# EAGLE board HITB_DXB_V1.1 (EAGLE 9.2.2)
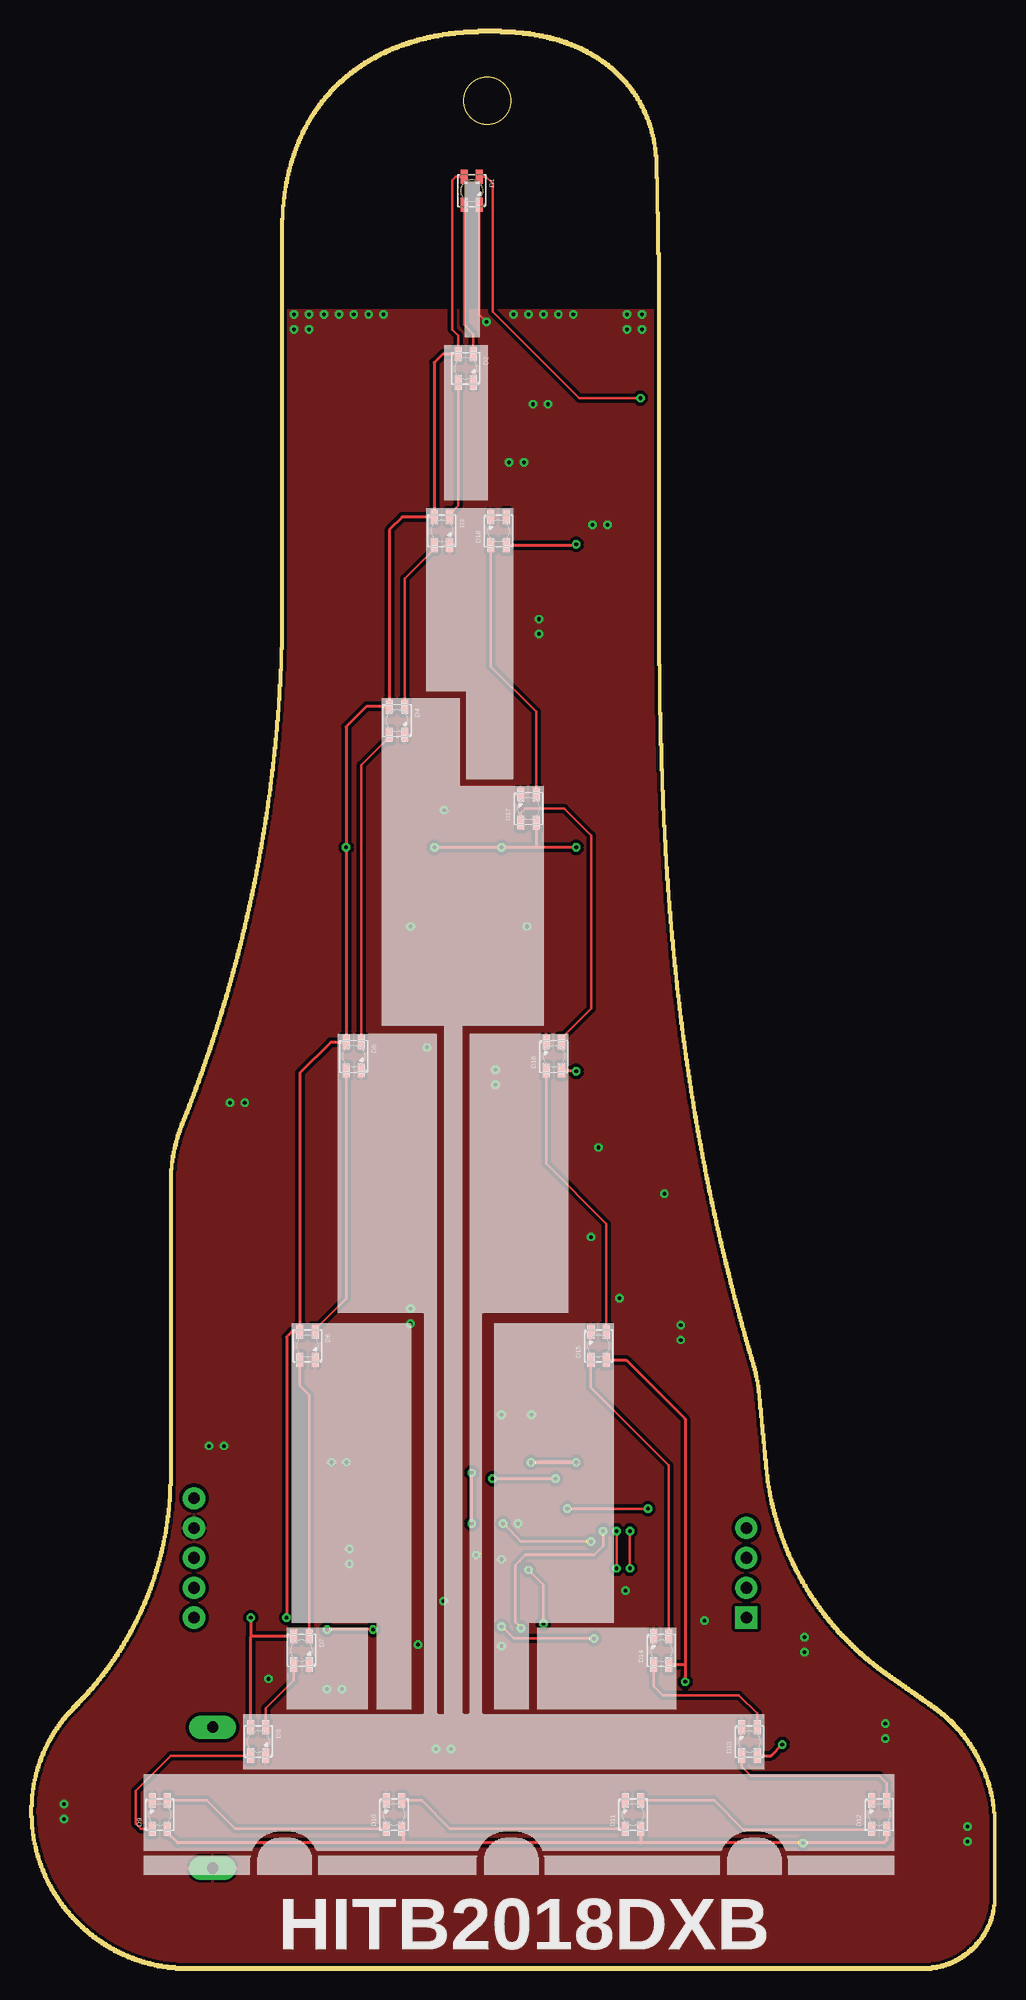
[diagram p0: board, top side]
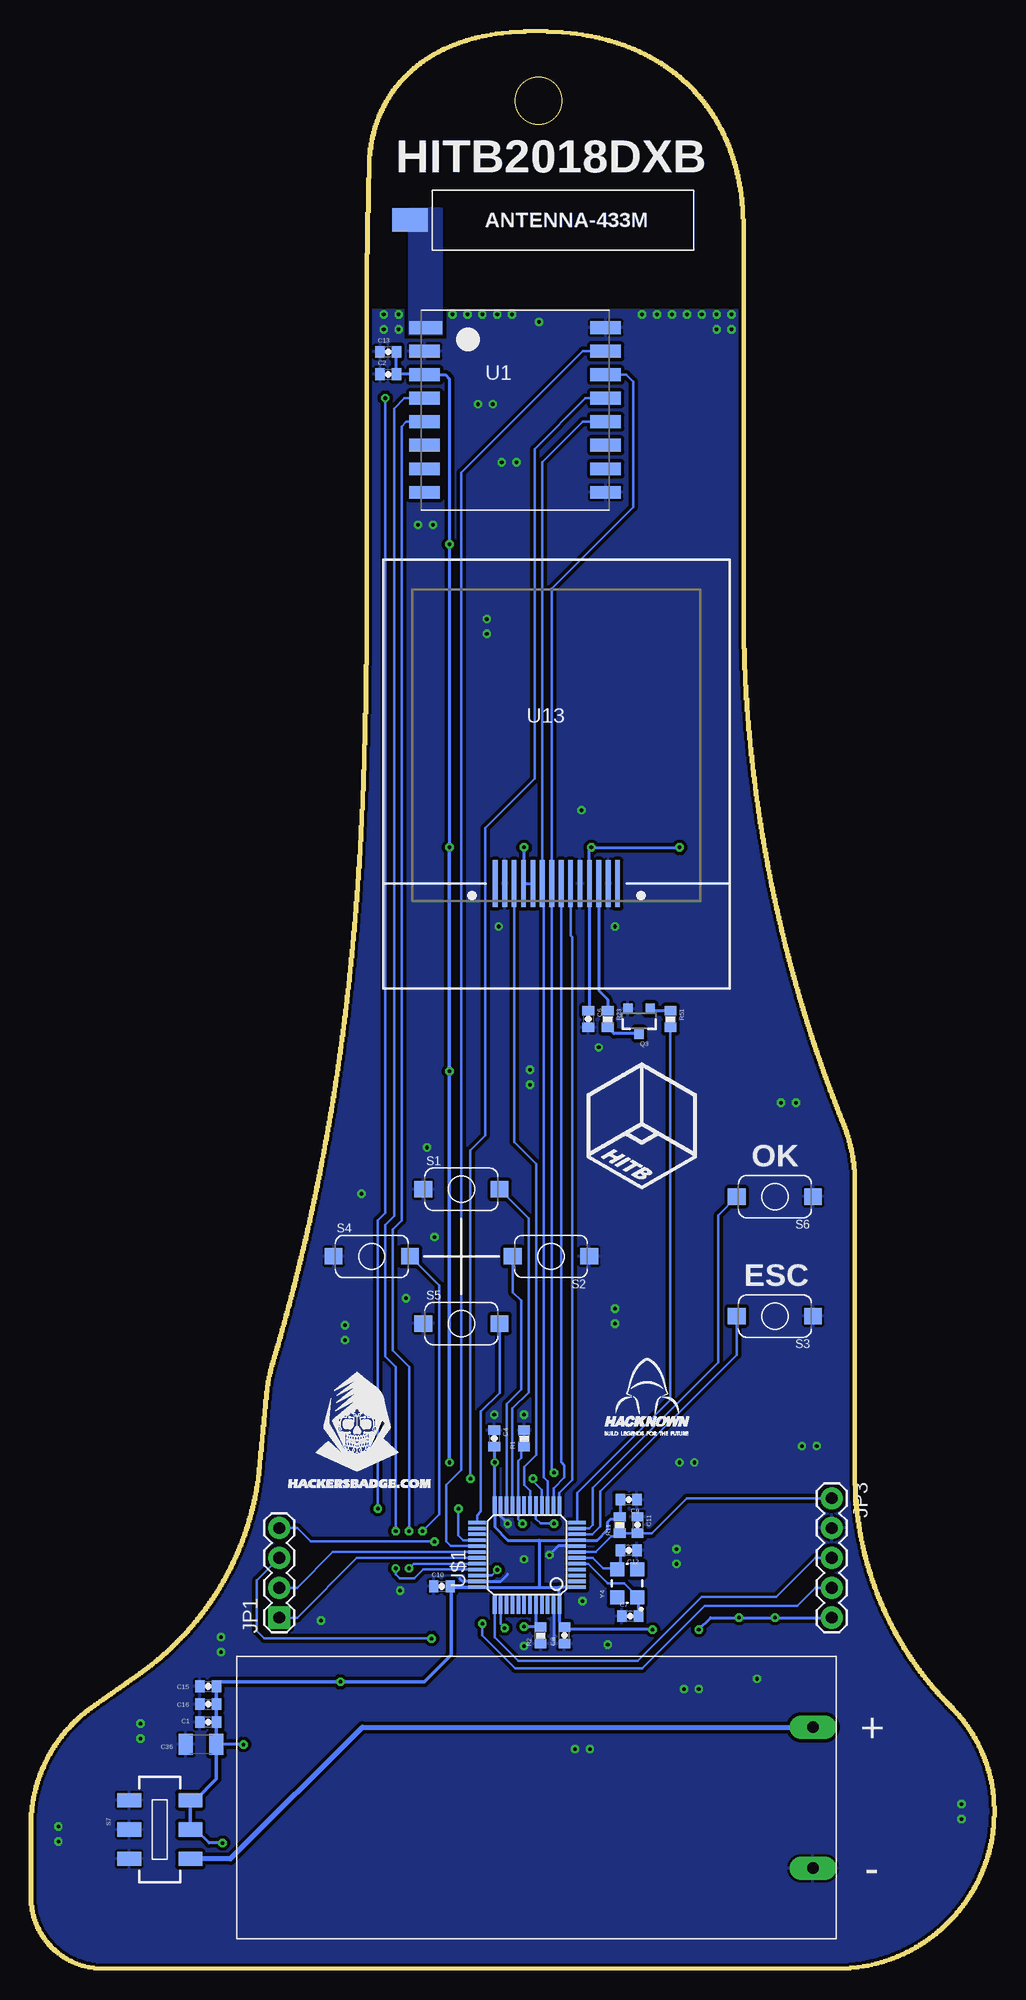
[diagram p1: board, bottom side, seen from below]

Size 82.25 x 165.13 mm. Coordinates in mm from the lower left corner, seen from the top.
Copper layers (1*16): Top 0.035mm / dielectric 1.5mm / Bottom 0.035mm
Design rules "yun": minimum track width 6mil, minimum drill 12mil, track to track 6mil, track to pad 6mil, pad to pad 6mil, via to via 6mil, smd to smd 6mil, copper to edge 10mil, drill to drill 6mil, minimum pad ring 8mil, minimum via ring 8mil, stop-mask expansion 4mil, vias tented up to drill 20mil, thermal gap 8mil
Net classes: 0 default: width 0.203 mm, clearance 0.203 mm; 1 3.3V: width 0.254 mm, clearance 0.254 mm
Milling: area 36.9,157.1 to 40.9,161.1

## Footprints (pad centres in the part's own frame; a part is rotated, then mirrored left to right if it is on the bottom)
BATTERY-AAA_Z2 = drill 0.95 pad 2 long: V+ 23.5,6; V- 23.5,-6
0603-CAP = smd 0.8 x 1: 1 -0.7,0; 2 0.7,0
1206 = smd 1.2 x 1.8: 1 -1.3,0; 2 1.3,0
RGB_2427 = smd 1.2 x 0.6: 1 1.2,-0.65; 2 1.2,0.65; 3 -1.2,0.65; 4 -1.2,-0.65
ANTENNA-433M_TH2550 = smd 3 x 2: P$1 0.635,0
1X04 = drill 1 pad 1.88 square: 1 0,0 | drill 1 pad 1.88: 2 2.54,0; 3 5.08,0; 4 7.62,0
1X05 = drill 1 pad 1.88: 1 0,0; 2 2.54,0; 3 5.08,0; 4 7.62,0; 5 10.16,0
SOT23-3 = smd 0.8 x 0.9: 1 -0.95,-1; 2 0.95,-1; 3 0,1.1
0603-RES = smd 0.8 x 1: 1 -0.7,0; 2 0.7,0
BUTTON_TSSURX = smd 1.5 x 1.4: P$1 -3.25,0; P$2 3.25,0
MSS22D18 = smd 1.2 x 2: 1 -2.5,2.6; 2 0,2.6; 3 2.5,2.6; 4 -2.5,-2.6; 5 0,-2.6; 6 2.5,-2.6
LORA_RA-01 = smd 2.8 x 1.1: 1 -7.6,7 | smd 2.6 x 1.1: 2 -7.7,5; 3 -7.7,3; 4 -7.7,1; 5 -7.7,-1; 6 -7.7,-3; 7 -7.7,-5; 8 -7.7,-7; 9 7.7,-7; 10 7.7,-5; 11 7.7,-3; 12 7.7,-1; 13 7.7,1; 14 7.7,3; 15 7.7,5; 16 7.7,7
TFT_1.44_SMD = smd 0.4 x 4: 1 5.2,-11.76; 2 4.4,-11.76; 3 3.6,-11.76; 4 2.8,-11.76; 5 2,-11.76; 6 1.2,-11.76; 7 0.4,-11.76; 8 -0.4,-11.76; 9 -1.2,-11.76; 10 -2,-11.76; 11 -2.8,-11.76; 12 -3.6,-11.76; 13 -4.4,-11.76; 14 -5.2,-11.76
TQFP48 = smd 0.3 x 1.5: 1 -2.75,-4.25; 2 -2.25,-4.25; 3 -1.75,-4.25; 4 -1.25,-4.25; 5 -0.75,-4.25; 6 -0.25,-4.25; 7 0.25,-4.25; 8 0.75,-4.25; 9 1.25,-4.25; 10 1.75,-4.25; 11 2.25,-4.25; 12 2.75,-4.25; 25 2.75,4.25; 26 2.25,4.25; 27 1.75,4.25; 28 1.25,4.25; 29 0.75,4.25; 30 0.25,4.25; 31 -0.25,4.25; 32 -0.75,4.25; 33 -1.25,4.25; 34 -1.75,4.25; 35 -2.25,4.25; 36 -2.75,4.25 | smd 1.5 x 0.3: 13 4.25,-2.75; 14 4.25,-2.25; 15 4.25,-1.75; 16 4.25,-1.25; 17 4.25,-0.75; 18 4.25,-0.25; 19 4.25,0.25; 20 4.25,0.75; 21 4.25,1.25; 22 4.25,1.75; 23 4.25,2.25; 24 4.25,2.75; 37 -4.25,2.75; 38 -4.25,2.25; 39 -4.25,1.75; 40 -4.25,1.25; 41 -4.25,0.75; 42 -4.25,0.25; 43 -4.25,-0.25; 44 -4.25,-0.75; 45 -4.25,-1.25; 46 -4.25,-1.75; 47 -4.25,-2.25; 48 -4.25,-2.75
CRYSTAL-SMD-3225 = smd 1.2 x 1.2: 1 -1.2,-0.85; 2 1.2,-0.85; 3 1.2,0.85; 4 -1.2,0.85

## Placement (x,y rotation side)
BAT1  [BATTERY-AAA_Z2]  39.09,14.68 0 bottom
C1  1uF  [0603-CAP]  67.04,21.1 0 bottom
C2  0.1uF  [0603-CAP]  51.72,135.78 0 bottom
C4  0.1uF  [0603-CAP]  42.71,45.23 270 bottom
C6  1uF  [0603-CAP]  34.71,80.92 270 bottom
C7  22pF  [0603-CAP]  31.15,30.12 0 bottom
C8  0.1uF  [0603-CAP]  36.74,28.47 90 bottom
C9  0.1uF  [0603-CAP]  31.28,40.03 180 bottom
C10  0.1uF  [0603-CAP]  47.15,32.66 0 bottom
C11  0.1uF  [0603-CAP]  30.52,37.87 270 bottom
C12  22pF  [0603-CAP]  31.28,35.71 180 bottom
C13  22uF  [0603-CAP]  51.72,137.69 0 bottom
C15  10uF  [0603-CAP]  67.04,24.15 0 bottom
C16  22uF  [0603-CAP]  67.04,22.63 0 bottom
C36  47uF  [1206]  67.65,19.2 180 bottom
D1  XT1511-2427  [RGB_2427]  37.63,151.41 270 top
D2  XT1511-2427  [RGB_2427]  37.12,136.29 270 top
D3  XT1511-2427  [RGB_2427]  35.09,122.45 270 top
D4  XT1511-2427  [RGB_2427]  31.28,106.32 270 top
D5  XT1511-2427  [RGB_2427]  27.59,77.75 270 top
D6  XT1511-2427  [RGB_2427]  23.66,53.11 270 top
D7  XT1511-2427  [RGB_2427]  23.15,27.2 270 top
D8  XT1511-2427  [RGB_2427]  19.47,19.45 270 top
D9  XT1511-2427  [RGB_2427]  11.08,13.23 90 top
D10  XT1511-2427  [RGB_2427]  31.02,13.23 90 top
D11  XT1511-2427  [RGB_2427]  51.34,13.23 90 top
D12  XT1511-2427  [RGB_2427]  72.3,13.23 90 top
D13  XT1511-2427  [RGB_2427]  61.25,19.45 90 top
D14  XT1511-2427  [RGB_2427]  53.76,27.2 90 top
D15  XT1511-2427  [RGB_2427]  48.42,53.11 90 top
D16  XT1511-2427  [RGB_2427]  44.61,77.75 90 top
D17  XT1511-2427  [RGB_2427]  42.45,98.83 90 top
D18  XT1511-2427  [RGB_2427]  39.91,122.45 90 top
J1  ANTENNA2_433M_TH2550  [ANTENNA-433M_TH2550]  50.5,148.9 0 bottom
JP1  [1X04]  60.99,29.99 90 bottom
JP3  [1X05]  14.01,40.15 270 bottom
Q3  S8050  [SOT23-3]  30.39,80.79 180 bottom
R1  10k  [0603-RES]  40.17,45.23 90 bottom
R2  10k  [0603-RES]  38.77,28.47 90 bottom
R11  10k  [0603-RES]  32.04,37.87 90 bottom
R23  10R  [0603-RES]  33.05,80.92 270 bottom
R51  1k  [0603-RES]  27.72,80.92 270 bottom
S1  SWITCH_2_T  [BUTTON_TSSURX]  45.5,66.44 0 bottom
S2  SWITCH_2_T  [BUTTON_TSSURX]  37.88,60.73 180 bottom
S3  SWITCH_2_T  [BUTTON_TSSURX]  18.83,55.65 180 bottom
S4  SWITCH_2_T  [BUTTON_TSSURX]  53.12,60.73 0 bottom
S5  SWITCH_2_T  [BUTTON_TSSURX]  45.5,55.01 0 bottom
S6  SWITCH_2_T  [BUTTON_TSSURX]  18.83,65.81 180 bottom
S7  SWITCH-DPDT  [MSS22D18]  71.16,11.96 270 bottom
U1  LORA-RA-01  [LORA_RA-01]  40.93,132.74 0 bottom
U3  LOGO_BADGE_12.2_9.5_S  [LOGO_BADGE_12.2_9.5_S]  60.23,41.04 0 bottom
U4  LOGO_HITB_9.4_10.8_S  [LOGO_HITH_9.4_10.8_S]  34.83,66.44 0 bottom
U5  LOGO_HACKNOWN_7.2_6.6_S  [LOGO_HACKNOWN_7.2_6.6_S]  33.31,45.49 0 bottom
U13  TFT_1.44_SMD  [TFT_1.44_SMD]  37.41,104.19 0 bottom
U$1  STM32F103C8T6  [TQFP48]  39.91,35.33 90 bottom
Y4  8MHz  [CRYSTAL-SMD-3225]  31.4,32.92 90 bottom

## Library data of the parts
BAT1 C1 C2 C4 C6-C13 C15 C16 C36 D1-D18 J1 JP1 JP3 R1 R2 R11 R23 R51 S1-S6 U1 U3-U5 U13 U$1 Y4 = 2SparkFun
Q3 = 1SparkFun
S7 = 0SparkFun

## Nets
1: U$1.41
2: U$1.40
3: U$1.39
3.3V: C1.2 C2.2 C4.2 C6.1 C8.2 C9.2 C10.2 C13.2 C15.2 C16.2 C36.1 D1.4 D2.4 D3.4 D4.4 D5.4 D6.4 D7.4 D8.4 D9.4 D10.4 D11.4 D12.4 D13.4 D14.4 D15.4 D16.4 D17.4 D18.4 JP3.5 R11.2 S7.1 S7.2 U1.3 U13.4 U13.10 U13.11 U$1.1 U$1.9 U$1.24 U$1.36 U$1.48
11: U$1.46
12: U$1.19
ANT: J1.P$1 U1.1
GND: BAT1.V- C1.1 C2.1 C4.1 C6.2 C7.1 C8.1 C9.1 C10.1 C11.1 C12.1 C13.1 C15.1 C16.1 C36.2 D1.2 D2.2 D3.2 D4.2 D5.2 D6.2 D7.2 D8.2 D9.2 D10.2 D11.2 D12.2 D13.2 D14.2 D15.2 D16.2 D17.2 D18.2 JP3.2 Q3.2 R1.2 R2.1 S1.P$1 S2.P$1 S3.P$1 S4.P$1 S5.P$1 S6.P$1 S7.4 S7.5 S7.6 U1.2 U1.9 U1.16 U13.2 U13.5 U13.13 U$1.8 U$1.23 U$1.35 U$1.47
I2C1_SCL: U$1.42
I2C1_SDA: U$1.43
KEY_DOWN: S5.P$2 U$1.25
KEY_ESC: S3.P$2 U$1.10
KEY_LEFT: S4.P$2 U$1.38
KEY_OK: S6.P$2 U$1.11
KEY_RIGHT: S2.P$2 U$1.22
KEY_UP: S1.P$2 U$1.21
LCD_A0: U13.7 U$1.14
LCD_BK: R51.2 U$1.12
LCD_CS: U13.12 U$1.18
LCD_RST: U13.6 U$1.13
LORA_CS: U1.15 U$1.29
LORA_DIO0: U1.5 U$1.32
LORA_RST: U1.4 U$1.33
MISO: U1.13 U$1.16
MISO2: U$1.27
MOSI: U1.14 U13.8 U$1.17
MOSI2: D1.3 U$1.28
N$1: D3.1 D4.3
N$2: C7.2 U$1.5 Y4.1
N$3: D6.1 D7.3
N$4: C12.2 U$1.6 Y4.3
N$5: D7.1 D8.3
N$6: D4.1 D5.3
N$7: R23.1 U13.3
N$8: D5.1 D6.3
N$9: Q3.3 R23.2
N$10: D8.1 D9.3
N$11: D9.1 D10.3
N$12: D10.1 D11.3
N$13: D11.1 D12.3
N$14: BAT1.V+ S7.3
N$15: D12.1 D13.3
N$16: D13.1 D14.3
N$17: D14.1 D15.3
N$18: D15.1 D16.3
N$19: D16.1 D17.3
N$20: D17.1 D18.3
N$29: Q3.1 R51.1
N$53: D2.1 D3.3
N$65: D1.1 D2.3
RF: U$1.45
SCK: U1.12 U13.9 U$1.15
SCK2: U$1.26
STM32_BOOT0: JP1.3 R2.2 U$1.44
STM32_BOOT1: JP1.4 R1.1 U$1.20
STM32_RST: C11.2 JP3.1 R11.1 U$1.7
STM32_RX: JP1.1 U$1.31
STM32_TX: JP1.2 U$1.30
SWCLK: JP3.3 U$1.37
SWDIO: JP3.4 U$1.34

## Tracks (layer width: path | path; a pad name or v marks a point on that pad's centre or on a via)
3.3V  (via drill 0.3)
  Top 0.203: D1.4 36.29,152.61 35.98,152.3 35.98,139.59 36.48,139.09 36.48,137.51 D2.4
  Top 0.254: v34.45,95.53 v40.17,95.53 43.09,95.53 | v46.52,95.53 43.09,95.53 | v29.25,28.98 v25.31,28.98 | D12.4 72.95,11.09 72.68,10.82 v65.82,10.82 51.98,10.82 | D11.4 51.99,10.83 51.98,10.82 | D9.4 11.73,11.69 12.61,10.82 31.79,10.82 | 51.98,10.82 31.79,10.82 | D10.4 31.79,11.92 31.79,10.82 | D2.4 35.14,137.49 34.44,136.79 D3.4 31.71,123.65 30.63,122.56 D4.4 28.67,107.52 26.94,105.8 v26.94,95.53 D5.4 25.62,78.95 23.01,76.33 D6.4 22.32,54.31 21.88,53.87 v21.88,29.99 | D7.4 22.51,28.41 18.89,28.41 18.82,28.34 | D8.4 18.82,28.34 | v18.83,29.99 18.82,29.98 18.82,28.34 | D13.4 63.1,18.25 v64.04,19.2 | D15.4 50.76,51.91 55.79,46.89 55.79,25.93 | 55.79,25.93 v55.79,24.53 | D14.4 55.72,26 55.79,25.93 | D16.4 46.45,76.55 v46.52,76.48 | D17.4 43.1,95.54 43.09,95.53 | D18.4 46.46,121.25 v46.52,121.31
  Top 0.305: v46.52,43.2 v42.66,43.2
  Bottom 0.203: 46.37,32.58 C10.2
  Bottom 0.254: C9.2 31.98,38.63 R11.2 32.23,38.38 32.8,38.38 33.05,38.12 33.05,37.49 33.96,36.58 U$1.9 38.9,36.58 | C6.1 34.61,81.71 U13.4 34.61,95.36 v34.45,95.53 v26.94,95.53 | U13.10 U13.11 40.21,95.48 v40.17,95.53 | C13.2 C2.2 48.68,135.78 U1.3 46.85,135.74 46.52,135.4 v46.52,121.31 v46.52,95.53 | C4.2 42.66,44.49 v42.66,43.2 U$1.24 42.66,37.7 41.54,36.58 38.9,36.58 | 37.16,32.53 U$1.48 37.16,29.59 C8.2 36.55,28.98 v29.25,28.98 | U$1.1 37.12,32.58 37.16,32.53 | U$1.36 38.9,32.58 | 38.9,32.58 37.21,32.58 37.16,32.53 | v25.31,28.98 24.29,29.99 v21.88,29.99 v18.83,29.99 JP3.5 | 38.9,36.58 38.9,32.58 | v64.04,19.2 C36.1 | v65.82,10.82 66.96,10.82 68.11,11.96 S7.2
  Bottom 0.305: S7.2 S7.1 68.15,14.46 66.35,16.26 C36.1 66.35,18.95 66.34,18.95 C36.1 C1.2 C16.2 C15.2 65.96,24.53 v55.79,24.53 48.68,24.53 46.37,26.84 46.37,32.58 U$1.36 | v46.52,95.53 v46.52,76.48 v46.52,43.2
ANT
  pour Bottom (isolate 0.305, no thermals): 47.15,149.88 49.95,149.88 49.95,139.21 47.15,139.21
GND  (via drill 0.3)
  Top 0.203: D1.2 38.28,140.85 v38.9,140.23
  Bottom 0.254: 41.56,33.68 42.16,33.08 U$1.35 45.41,33.08 45.63,33.3 | U$1.8 37.26,36.08 v38.01,35.33 | U$1.47 37.66,27.74 37.63,27.71 | U$1.23 42.16,38.59 v41.56,38
  other vias: 40.17,47.27 42.71,47.27 41.18,140.87 42.45,140.87 43.72,140.87 44.99,140.87 46.26,140.87 50.83,140.87 52.1,140.87 50.83,139.59 52.1,139.59 22.51,140.87 23.78,140.87 25.05,140.87 26.32,140.87 27.59,140.87 28.86,140.87 30.13,140.87 33.82,78.51 32.42,88.8 40.17,34.95 50.71,32.28 35.21,31.39 33.05,27.71 40.17,27.58 42.33,88.8 35.29,98.7 54.01,66.06 48.42,70 47.79,62.38 50.2,57.17 47.91,122.96 49.18,122.96 40.8,128.29 42.07,128.29 42.83,133.25 44.1,133.25 22.51,139.59 23.78,139.59 43.34,113.69 43.34,114.96 17.05,73.81 18.32,73.81 15.28,44.6 16.55,44.6 2.96,12.85 2.96,14.12 79.79,10.94 79.79,12.21 72.81,19.71 72.81,20.98 65.95,27.07 65.95,28.34 57.44,29.74 55.41,53.62 55.41,54.89 39.66,75.33 39.66,76.6 32.42,55.01 32.42,56.28 26.96,43.2 25.69,43.2 27.21,35.84 27.21,34.57 25.31,23.9 26.58,23.9 34.58,18.82 35.85,18.82 20.36,24.79
  pour Top (isolate 0.305, rank 2): 0.04,-0.1 82.58,-0.1 82.58,141.25 0.04,141.25
  pour Bottom (isolate 0.305, rank 2): 0.04,-0.1 82.58,-0.1 82.58,141.25 0.04,141.25
KEY_DOWN
  Bottom 0.203: S5.P$2 42.25,49.12 43.85,47.52 43.85,39.03 44.16,38.71 U$1.25
KEY_ESC
  Bottom 0.203: U$1.10 34.35,37.08 33.69,37.74 33.69,40.74 22.08,52.35 S3.P$2
KEY_LEFT  (via drill 0.3)
  Top 0.203: v41.82,29.11 41.31,29.61 41.31,34.44 42.2,35.33 48.04,35.33 48.8,36.09 v48.8,37.36
  Bottom 0.203: S4.P$2 47.41,58.26 47.41,38.76 v48.8,37.36 | U$1.38 42.16,29.45 v41.82,29.11
KEY_OK
  Bottom 0.203: U$1.11 34.61,37.58 34.32,37.87 34.32,41.04 23.66,51.71 23.66,64.23 S6.P$2
KEY_RIGHT
  Bottom 0.203: S2.P$2 41.13,57.68 40.42,56.97 40.42,49.43 41.66,48.18 U$1.22
KEY_UP
  Bottom 0.203: U$1.21 41.16,47.79 39.79,49.17 39.79,63.98 S1.P$2
LCD_A0
  Bottom 0.203: U$1.14 37.66,41.01 36.74,41.93 36.74,42.95 37.01,43.23 U13.7
LCD_BK
  Bottom 0.203: R51.2 27.72,48.54 35.66,40.59 U$1.12
LCD_CS
  Bottom 0.203: U13.12 41.01,70.47 39.15,68.6 39.15,43.84 40.17,42.82 40.17,41.3 39.66,40.79 U$1.18
LCD_RST
  Bottom 0.203: U13.6 36.21,88.02 36.09,87.89 36.09,41.69 37.16,40.62 U$1.13
LORA_CS
  Bottom 0.203: U1.15 35.17,137.74 45.5,127.4 45.5,42.57 46.77,41.3 46.77,36.47 46.39,36.09 44.17,36.09 U$1.29
LORA_DIO0  (via drill 0.3)
  Top 0.203: v49.95,37.36 v49.95,34.19
  Bottom 0.203: U1.5 50.18,131.74 50.58,131.34 50.58,63.78 51.34,63.01 51.34,52.73 49.95,51.33 v49.95,37.36 | v49.95,34.19 49.55,34.58 U$1.32
LORA_RST  (via drill 0.3)
  Top 0.203: v51.09,34.19 v51.09,37.36
  Bottom 0.203: U1.4 50.34,133.74 51.22,132.86 51.22,64.16 51.98,63.4 51.98,52.22 51.09,51.33 v51.09,37.36 | U$1.33 48.73,34.08 49.5,33.32 50.73,33.32 51.09,33.68 v51.09,34.19
MISO  (via drill 0.3)
  Top 0.203: v44.74,41.8 v39.4,41.8
  Bottom 0.203: U$1.16 38.66,40.85 39.4,41.59 v39.4,41.8 | U1.13 34.98,133.74 39.28,129.44 39.28,101.37 43.47,97.18 43.47,71.02 44.74,69.74 v44.74,41.8
MOSI  (via drill 0.3)
  Top 0.203: v37.63,38 v37.63,42.31
  Bottom 0.203: U1.14 31.48,135.74 30.9,135.15 30.9,124.48 37.81,117.56 U13.8 37.81,42.5 v37.63,42.31 | U$1.17 39.16,38.39 38.77,38 v37.63,38
MOSI2  (via drill 0.3)
  Top 0.203: D1.3 38.84,152.61 39.4,152.04 39.4,141.12 46.77,133.75 v51.98,133.75 | v52.61,39.27 v45.75,39.27
  Bottom 0.203: U$1.28 45.35,36.58 45.75,36.98 v45.75,39.27 | v51.98,133.75 51.98,64.41 52.61,63.78 v52.61,39.27
N$1
  Top 0.203: D3.1 34.44,120.91 31.93,118.4 D4.3
N$2
  Bottom 0.203: U$1.5 34.72,34.58 33.05,32.92 31.63,32.92 30.92,32.2 30.92,32.08 Y4.1
  Bottom 0.254: Y4.1 30.45,31.61 C7.2
N$3
  Top 0.203: D6.1 23.01,49.75 23.8,48.96 D7.3
N$4
  Bottom 0.203: U$1.6 34.33,35.08 33.44,34.19 32.32,34.19 Y4.3
  Bottom 0.254: C12.2 31.98,34.39 Y4.3
N$5
  Top 0.203: D7.1 22.5,24.64 20.12,22.26 D8.3
N$6
  Top 0.203: D4.1 30.63,104.91 28.24,102.53 D5.3
N$7
  Bottom 0.254: U13.3 33.81,83.33 33.05,82.57 R23.1
N$8
  Top 0.203: D5.1 26.94,57.16 24.31,54.52 D6.3
N$9
  Bottom 0.254: Q3.3 32.53,79.69 R23.2
N$10
  Top 0.203: D9.3 9.49,12.03 9.05,12.47 9.05,15.26 12.04,18.25 D8.1
N$11
  Top 0.203: D9.1 15.09,14.43 17.49,12.03 D10.3
N$12
  Top 0.203: D10.1 33.38,14.43 35.78,12.03 D11.3
N$13
  Top 0.203: D11.1 58.27,14.43 60.74,11.96 71.58,11.96 D12.3
N$14
  Bottom 0.406: S7.3 65.15,9.46 53.93,20.68 BAT1.V+
N$15
  Top 0.203: D12.1 72.95,15.88 72.3,16.53 61.38,16.53 60.6,17.31 D13.3
N$16
  Top 0.203: D14.3 53.11,24.17 53.88,23.39 60.36,23.39 61.9,21.85 D13.1
N$17
  Top 0.203: D15.3 47.77,49.57 54.41,42.93 D14.1
N$18
  Top 0.203: D16.3 43.96,68.62 49.07,63.51 D15.1
N$19
  Top 0.203: D17.3 41.8,98.43 42.2,98.83 45.5,98.83 47.79,96.54 47.79,81.81 45.26,79.28 D16.1
N$20
  Top 0.203: D18.3 39.26,110.91 43.1,107.07 D17.1
N$29
  Bottom 0.254: R51.1 29.27,81.62 Q3.1
N$53
  Top 0.203: D2.1 36.47,124.59 35.74,123.86 D3.3
N$65
  Top 0.203: D1.1 36.98,139.99 37.77,139.2 D2.3
SCK
  Bottom 0.203: U$1.15 38.16,41.58 38.49,41.9 38.49,92.31 U13.9 38.61,128.32 35.2,131.74 U1.12
STM32_BOOT0  (via drill 0.3)
  Top 0.203: v40.17,29.23 41.18,28.22 v48.04,28.22
  Bottom 0.203: JP1.3 62.9,33.17 62.9,28.85 62.26,28.22 v48.04,28.22
  Bottom 0.254: U$1.44 39.16,29.56 38.83,29.23 | v40.17,29.23 38.83,29.23 | 38.83,29.23 R2.2
STM32_BOOT1  (via drill 0.3)
  Top 0.203: v47.79,36.47 41.82,36.47 v40.29,38
  Bottom 0.203: v40.29,38 40.66,38.36 U$1.20 40.66,43.34 40.42,43.58 40.42,44.28 R1.1 | JP1.4 59.47,37.61 58.33,36.47 v47.79,36.47
STM32_RST
  Bottom 0.203: U$1.7 34.07,35.58 32.74,36.91 32.29,36.91 R11.1 C11.2 29.31,37.17 26.32,40.15 JP3.1
STM32_RX
  Bottom 0.203: U$1.31 54.39,35.08 59.47,29.99 JP1.1
STM32_TX
  Bottom 0.203: U$1.30 56.43,35.58 59.47,32.53 JP1.2
SWCLK
  Bottom 0.203: U$1.37 42.66,28.3 40.67,26.31 30.52,26.31 25.05,31.77 18.7,31.77 15.4,35.07 JP3.3
SWDIO  (via drill 0.3)
  Top 0.203: v42.45,34.06 43.72,32.79 v43.72,29.49
  Bottom 0.203: U$1.34 42.93,33.58 v42.45,34.06 | v43.72,29.49 43.72,28.47 40.93,25.68 30.13,25.68 24.8,31.01 16.93,31.01 15.4,32.53 JP3.4

## Text on the board
tPlace: HITB2018DXB
bPlace: HITB2018DXB | OK | ESC
bStop: OFF | ON